# Altium PCB UZ_Per_ADC_to_BNC.PcbDoc
Units mm, origin at the board's own origin, x right, y up, seen from the top; angles counter-clockwise.
Board outline 53 x 90 mm, 2 copper layers (Top Layer, Bottom Layer), stack 1.571 mm thick; 22 components, 11 nets, 60 pads, 3 vias.
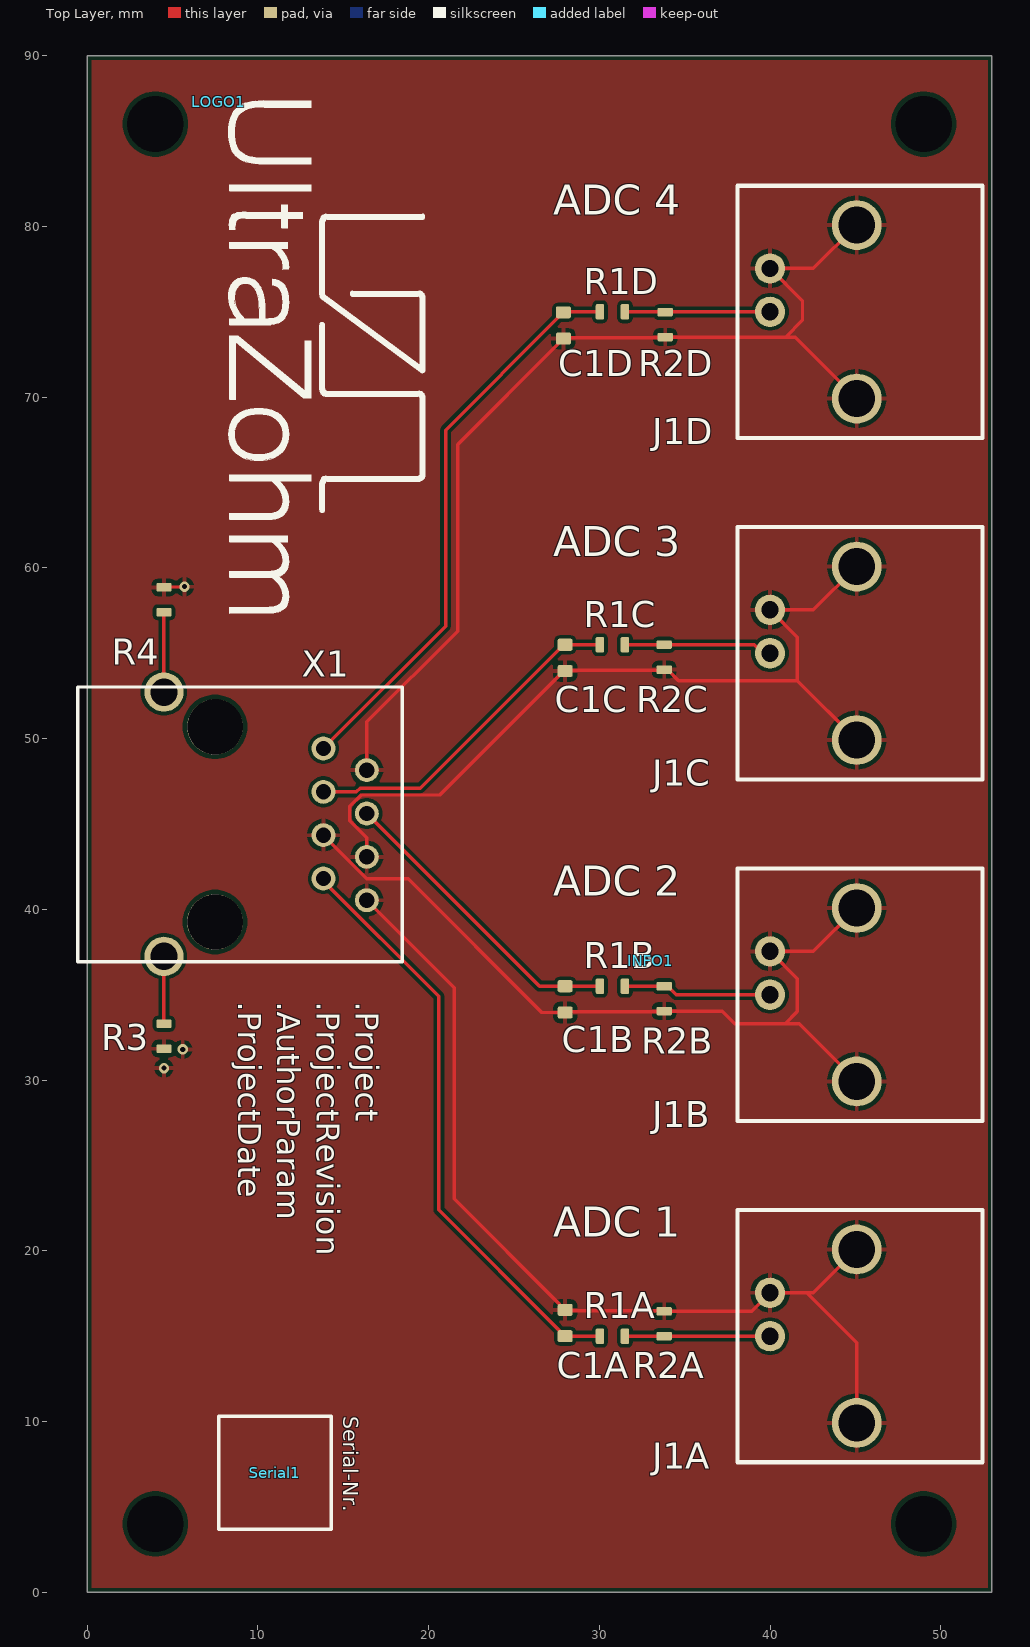
[diagram p0: Top Layer view]
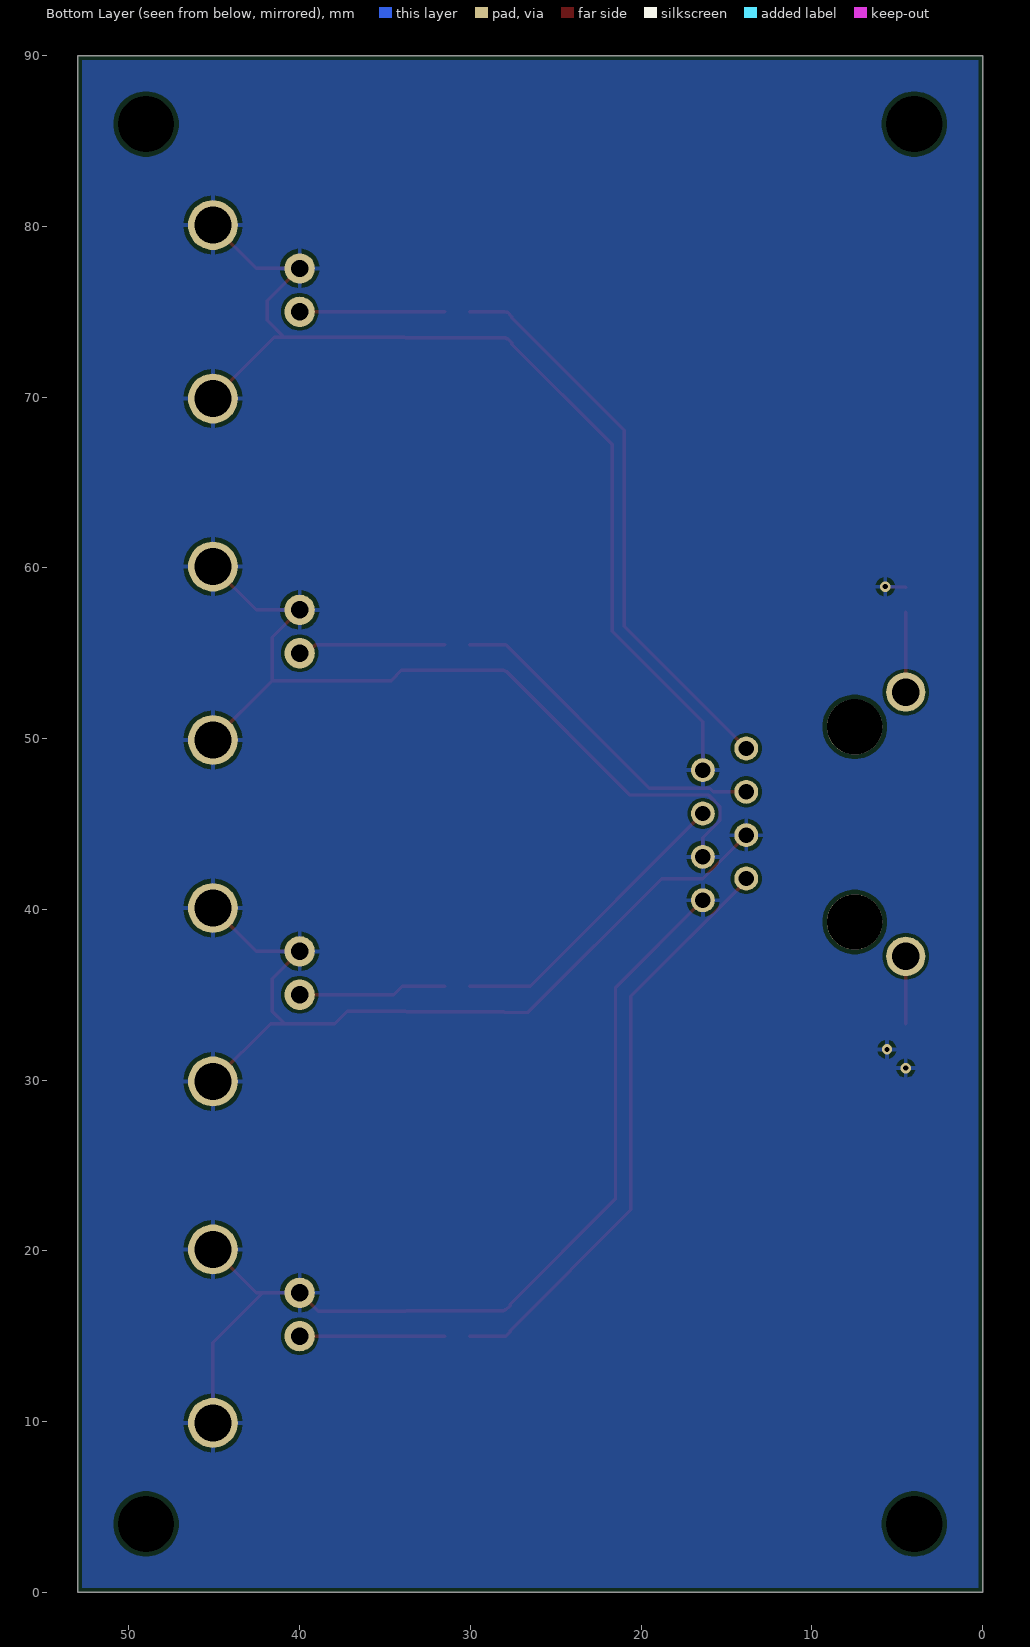
[diagram p1: Bottom Layer view, seen from below]
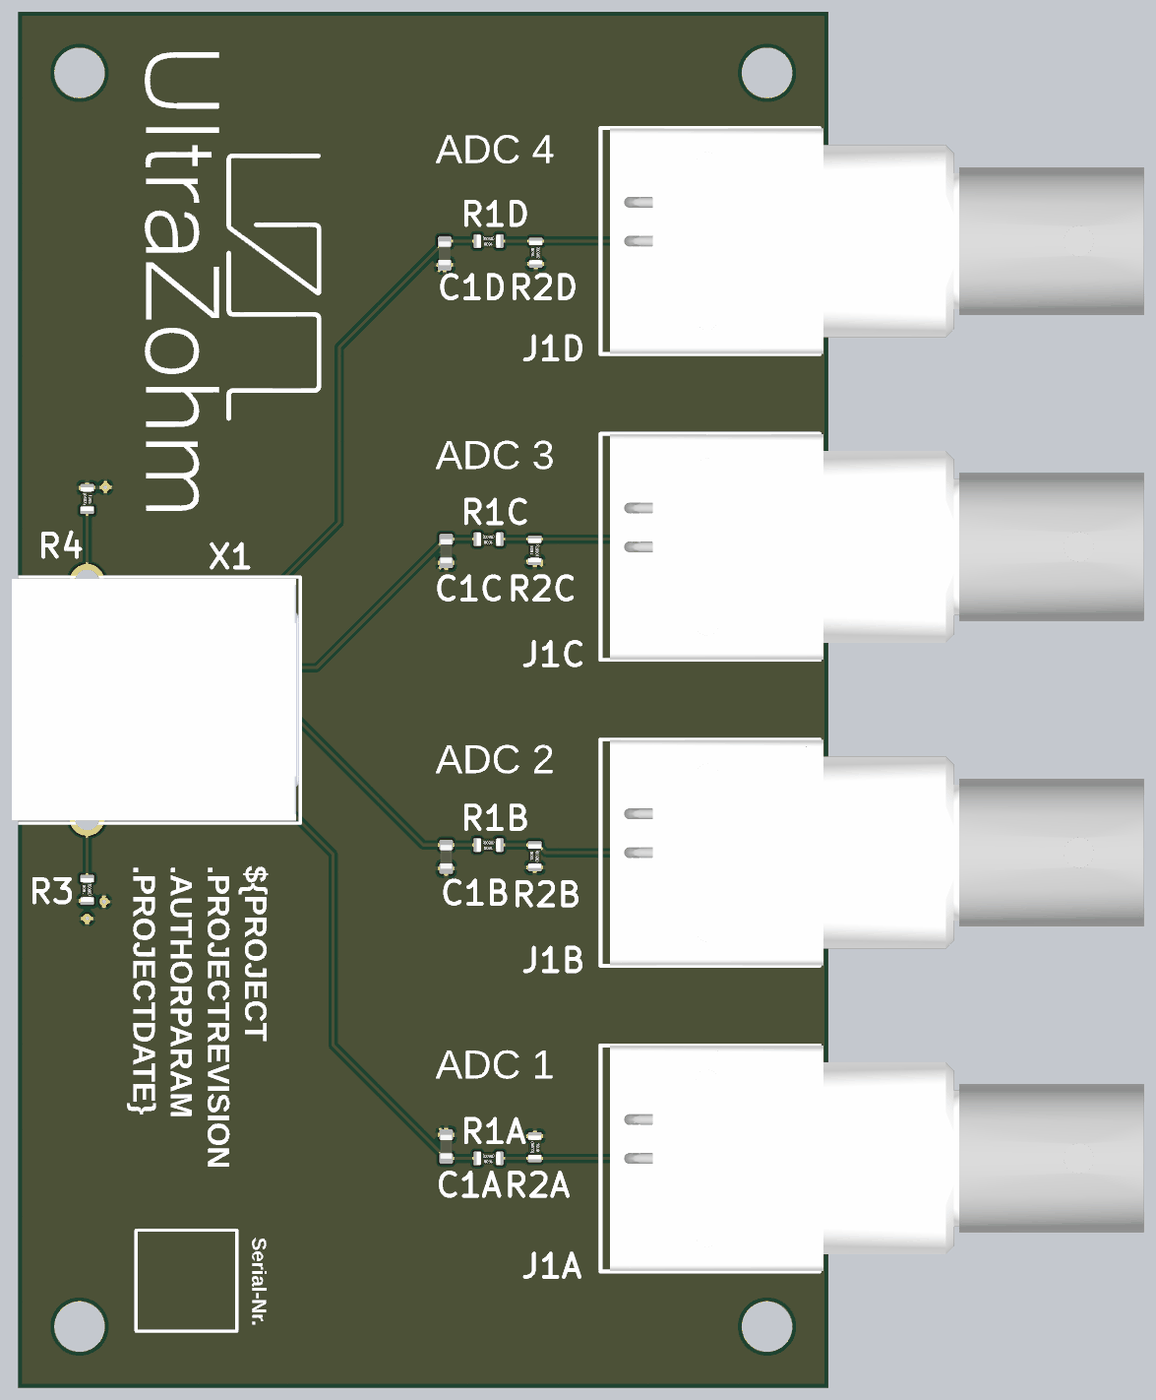
[diagram p2: 3D render of the assembled board from above, using the file's embedded part models]

## Layer stack, top to bottom
Top Solder: solder mask 0.0102, Solder Resist, Dk 3.5
Top Layer: signal copper 0.0356
Dielectric 1: dielectric 1.5, FR-4, Dk 4.8
Bottom Layer: signal copper 0.0356
Bottom Solder: solder mask 0.0102, Solder Resist, Dk 3.5

## Board outline
0,0 53,0 53,90 0,90

## Design rules (kind name [scope] priority, off if disabled: settings)
BoardOutlineClearance [All] p1: gap=0.254 ignorepadtopadclearanceinfootprint=FALSE except(0: Arc-SplitContinuation Track-SplitContinuation SMDPad-SplitContinuation THPad-SplitContinuation Via-SplitContinuation Fill-SplitContinuation Poly-SplitContinuation Region-SplitContinuation Text-SplitContinuation)
Clearance [All] p1: gap=0.2 ignorepadtopadclearanceinfootprint=FALSE except(0.127: Arc-Arc Arc-Track Track-Track; 0.254: Arc-Via Arc-Text Arc-Hole Track-Via Track-Text Track-Hole SMDPad-Via SMDPad-Text SMDPad-Hole THPad-Via THPad-Text THPad-Hole Via-Via Via-Text Via-Hole Fill-Text Fill-Hole Poly-Text Poly-Hole Region-Text Region-Hole Text-Text Text-Hole)
HoleSize [All] p1: absolutevalues=TRUE maxlimit=6.3 minlimit=0.3 maxpercent=80.000 minpercent=20.000
PolygonConnect [All] p1: connectstyle=Relief reliefconductorwidth=0.254 reliefentries=4 polygonreliefangle="90 Angle" airgapwidth=0.254
RoomDefinition BNC3 [InComponentClass('BNC3')] p1: confinementstyle=ConfineIn formatcopy=TRUE lockcomponents=FALSE outline 27,46.667 73.7,46.667 73.7,63.767 27,63.767
RoomDefinition BNC2 [InComponentClass('BNC2')] p2: confinementstyle=ConfineIn formatcopy=TRUE lockcomponents=FALSE outline 27,26.667 73.7,26.667 73.7,43.767 27,43.767
RoomDefinition BNC4 [InComponentClass('BNC4')] p3: confinementstyle=ConfineIn formatcopy=TRUE lockcomponents=FALSE outline 27,66.5 73.7,66.5 73.7,83.6 27,83.6
RoomDefinition BNC1 [InComponentClass('BNC1')] p4: confinementstyle=ConfineIn formatcopy=TRUE lockcomponents=FALSE outline 27,6.5 73.7,6.5 73.7,23.6 27,23.6
RoutingVias [All] p1: holewidth=0.2 width=0.4 viastyle="Through Hole" minholewidth=0.2 minwidth=0.4 maxholewidth=3.4 maxwidth=3.4
SolderMaskExpansion [All] p1: expansion=0.102 istentingtop=FALSE
SupplyNets "Schematic Supply Nets" [InNet('GND')] p1: voltage=0.000
Width [All] p1: maxlimit=0.5 minlimit=0.2 preferedwidth=0.254
29 further rules are at their usual default settings.

## Classes and differential pairs
net class "AIN A P[1..4]": "AIN A P1" "AIN A P2" "AIN A P3" "AIN A P4"
channel class rj45_bnc: BNC1 BNC2 BNC3 BNC4
component class Top_sheet: INFO1 LOGO1 R3 R4 Serial1 X1
component class BNC4: C1D J1D R1D R2D
component class BNC3: C1C J1C R1C R2C
component class BNC2: C1B J1B R1B R2B
component class BNC1: C1A J1A R1A R2A

## Components (designator, comment, footprint, x,y, rotation, side; value= is the part's Value field where it differs from the comment)
C1A "10 nF" C_0603_TE 28,15.77 r180 top (schematic designator C1)
C1B "10 nF" C_0603_TE 28,34.73 r0 top (schematic designator C1)
C1C "10 nF" C_0603_TE 28,54.73 r0 top (schematic designator C1)
C1D "10 nF" C_0603_TE 27.9,74.2 r0 top (schematic designator C1)
INFO1 "Design Information" Design_info 33,37 r270 top
J1A "5227661-1" "Right Angle BNC" 40,15 r270 top (schematic designator J1)
J1B "5227661-1" "Right Angle BNC" 40,35 r270 top (schematic designator J1)
J1C "5227661-1" "Right Angle BNC" 40,55 r270 top (schematic designator J1)
J1D "5227661-1" "Right Angle BNC" 40,75 r270 top (schematic designator J1)
LOGO1 "UZ Logo" UZ_Logo_small 7.7,87.3 r270 top value=Logo
R1A "0R" R_0603_TE 30.77,15 r270 top (schematic designator R1)
R1B "0R" R_0603_TE 30.77,35.5 r270 top (schematic designator R1)
R1C "0R" R_0603_TE 30.77,55.5 r270 top (schematic designator R1)
R1D "0R" R_0603_TE 30.77,75 r270 top (schematic designator R1)
R2A "10k" R_0603_TE 33.8,15.73 r0 top (schematic designator R2)
R2B "10k" R_0603_TE 33.8,34.77 r180 top (schematic designator R2)
R2C "10k" R_0603_TE 33.8,54.77 r180 top (schematic designator R2)
R2D "10k" R_0603_TE 33.86,74.249 r180 top (schematic designator R2)
R3 "0R" R_0603_TE 4.5,32.57 r180 top
R4 "0R" R_0603_TE 4.5,58.13 r0 top
Serial1 "Serialnumber 6.3 x 6.3 mm" SERIAL_6.3X6.3MM 11,7 r270 top value=REV
X1 "R-RJ45R10P-B000" R-RJ45R10P-B000 10,45 r270 top

## Footprints (in the part's own frame and the unit in brackets; to place one, negate y for a bottom-side part, rotate by r counter-clockwise, add the part's x,y. Pads: shape width x height; smd on the part's side, far side on the other; paste and mask are expansions set on the pad)
C_0603_TE [mm] "Vishay VJ0603 1.6 x 0.8 (+0.15/-0.1) 0.4 +/- 0,15mm Kontakte"
  rrect33% 0.88x0.71 smd: 1(0,0.77) 2(0,-0.77)
  body extent -0.4,-0.8 0.4,0.8, height 1
Design_info [mm] "Design information about the PCB"
R-RJ45R10P-B000 [mm]
  round 1.4 hole 0.9: A1(-4.425,3.842) A2(-3.155,6.382) A3(-1.885,3.842) A4(-0.615,6.382) A5(0.655,3.842) A6(1.925,6.382) A7(3.195,3.842) A8(4.465,6.382)
  round 3.25 hole 3.25 unplated: MH3(-5.69,-2.508) MH4(5.74,-2.508)
  round 2.3 hole 1.6: S1(-7.725,-5.5) S2(7.75,-5.5)
  silkscreen extent -8.03,-10.55 8.08,8.45, body extent -7.9,-10.43 7.9,8.37, height 14.5
R_0603_TE [mm] "Vishay D0603 1.55 x 0.85 (+0.1/-0.05) 0.3 +/- 0,2mm Kontakte"
  rrect33% 0.9x0.5 smd: 1(0,0.73) 2(0,-0.73)
  body extent -0.42,-0.78 0.43,0.77, height 0.45
"Right Angle BNC" [mil]
  round 70 hole 40: 1(0,0) 2(-100,0)
  round 115 hole 85: 3(200,200) 4(-200,200)
  silkscreen extent -291,-75 291,490, body extent -290,-50 291,1325, height 519
SERIAL_6.3X6.3MM [mm]
  silkscreen extent -3.3,-3.3 3.3,3.3
UZ_Logo_small [mm] "logo width 3cm"
  silkscreen extent -0.05,0.57 29.94,12.12

## Part data
C1A C1B C1C C1D: library part UZgen_C_0603_10nF_50V_NP0, "Generic capacitor", Device Package=0603, Manufacturer=UZgen, Tolerance="10 %", Voltage=50V, Created from=UZgenTool, Created On="13.12.2024 11:08:49", Last Updated="13.12.2024 11:08:49", Manufacturer Part Number=UZgen_C_0603_10nF_50V_NP0, Mounting Type=SMD, PartID=5806, Technology=NP0
INFO1: Manufacturer=UltraZohm, Supplier Part Number 1=-, Component Type="Design Information", ComponentLink1Description=https://docs.ultrazohm.com/, ComponentLink1URL=homepage, Created from=MGremer, Created On="03.11.2021 09:04:23", Last Updated="03.11.2021 09:28:34", Live Cycle Status=1, Manufacturer Part Number="Design Information", PartID=12, Supplier 1=-, Type="Design Information"
J1A J1B J1C J1D: "RF Connectors / Coaxial Connectors 50 Ohm BNC Jack and Plug / right-angle", Alternate Manufacturer=-, LCSC Part Number=C2979611, Manufacturer="TE Connectivity", Operating Temperature="-65 °C to +125 °C", PartNumber="Used in BOM report", Supplier Part Number 1=571-5227661-1, Alternate PartNumber=-, ComponentLink1Description=Datasheet, ComponentLink1URL=https://www.te.com/commerce/DocumentDelivery/DDEController?Action=srchrtrv&DocNm=1307191_BNC_Connectors&DocType=Catalog%20Section&DocLang=English&PartCntxt=5227661-1&DocFormat=pdf, CompType="Used in some BOM reports.  Useful for finding later.", Created from=EAufderheide, Created On="16.01.2026 12:04:20", Last Updated="16.01.2026 12:45:05", Manufacturer Part Number=5227661-1, Mounting Type=THT, MountType="SMT, TH, or N/A", PackageReference="eg:  0603, used in PnP report", PartID=71, RoHS="Used in BOM report.  Use Y or N.", Series=BNC, Supplier 1=Mouser, Supplier 2=LCSC, Supplier 3=LCSC, Supplier Part Number 2=C2979611, Supplier Part Number 3=C305920, SymbolCreator="Use LDAP id", SymbolVersion="use current date i.e. 2008-05-20", U/M="EA, IN, or GM"
LOGO1: library part "Logo small", Manufacturer=UltraZohm, Supplier Part Number 1=-, Component Type=Logo, ComponentLink1Description=https://docs.ultrazohm.com/, ComponentLink1URL=homepage, Created=Jan2021_Liegmann, Created from=MGremer, Created On="03.11.2021 09:04:23", Last Updated="03.11.2021 09:05:50", Live Cycle Status=1, Manufacturer Part Number="Logo small", PartID=10, Supplier 1=-, Type=Logo
R1A R1B R1C R1D R3 R4: library part UZgen_R_0603_0R, "Generic resistor", Device Package=0603, Manufacturer=UZgen, Tolerance="1 %", Created from=UZgenTool, Created On="08.07.2024 14:34:30", Last Updated="08.07.2024 14:34:30", Manufacturer Part Number=UZgen_R_0603_0R, Mounting Type=SMD, PartID=581
R2A R2B R2C R2D: library part UZgen_R_0603_10k, "Generic resistor", Device Package=0603, Manufacturer=UZgen, Tolerance="1 %", Created from=AGeiger, Created On="02.07.2024 14:34:53", Last Updated="02.07.2024 14:37:16", Manufacturer Part Number=UZgen_R_0603_10k, Mounting Type=SMD, PartID=1
Serial1: library part "Serial Number", "Serial Number", Manufacturer=UltraZohm, Supplier Part Number 1=-, Component Type="Serial Number", ComponentLink1Description=https://docs.ultrazohm.com/, ComponentLink1URL=homepage, Created=2018_09_18_AGeiger, Created from=MGremer, Created On="03.11.2021 09:04:23", Last Updated="03.11.2021 09:28:34", Live Cycle Status=1, Manufacturer Part Number="Serial Number", PartID=11, Supplier 1=-, Type="Serial Number"
X1: "RJ45Receptacle 1 Shielded Bend insert Without LED 0℃~+70℃ Plugin Ethernet Connectors / Modular Connectors (RJ45 RJ11) ROHS", LCSC Part Number=C386758, Manufacturer="Ckmtw(Shenzhen Cankemeng)", Operating Temperature="0 °C to +70 °C", ComponentLink1Description=Datasheet, ComponentLink1URL=https://jlcpcb.com/api/file/downloadByFileSystemAccessId/8588892085580021760, Created from=KIlhan, Created On="20.03.2025 09:19:07", Last Updated="18.05.2025 18:44:47", Manufacturer Part Number=R-RJ45R10P-B000, Mounting Type=THT, PartID=57, Series=RJ45, Supplier 1=LCSC, Supplier Part Number 1=C386758

## Free pads (board coordinates)
  round 1.524 hole 3.3: 2(4,4) 2(4,86) 2(49,4) 2(49,86)

## Via types
v1: diameter 0.6, hole 0.3, Top Layer to Bottom Layer, 3 vias

## Nets (pads, with @x,y where several pads share a name; then routed paths per layer and width w, separated by ;. In a path a pad name is that pad's centre, name@x,y a point inside that pad or via, vN(x,y) a via of type N, cw(c..) or ccw(c..) an arc to the next point about the centre after c; other vN are vias at no path point)
"AIN A P1": C1A.1 R1A.2 X1.A7 | length 34.8
  Top Layer w0.2: X1.A7 13.842,41.661 20.6,34.903 20.6,22.4 27.671,15.329 27.671,15.254 27.924,15 C1A.1 R1A.2
"AIN A P2": C1B.1 R1B.2 X1.A4 | length 17.8
  Top Layer w0.2: X1.A4 26.497,35.5 C1B.1 R1B.2
"AIN A P3": C1C.1 R1C.2 X1.A3 | length 19.8
  Top Layer w0.2: X1.A3 15.776,46.885 15.991,47.1 19.515,47.1 27.915,55.5 C1C.1 R1C.2
"AIN A P4": C1D.1 R1D.2 X1.A1 | length 33.5
  Top Layer w0.2: X1.A1 21,56.583 21,68.07 27.571,74.641 27.571,74.716 27.824,74.97 C1D.1 ; C1D.1@28,75 R1D.2
BNC_SigA: J1A.1 R1A.1 R2A.2 | length 8.5
  Top Layer w0.2: R1A.1 J1A.1
BNC_SigB: J1B.1 R1B.1 R2B.2 | length 8.7
  Top Layer w0.2: R1B.1 R2B.2 34,35.5 34.5,35 J1B.1
BNC_SigC: J1C.1 R1C.1 R2C.2 | length 8.7
  Top Layer w0.2: R1C.1 R2C.2 39.073,55.5 39.573,55 J1C.1
BNC_SigD: J1D.1 R1D.1 R2D.2 | length 8.5
  Top Layer w0.2: R1D.1 J1D.1
GND: C1A.2 C1B.2 C1C.2 C1D.2 J1A.2 J1A.3 J1A.4 J1B.2 J1B.3 J1B.4 J1C.2 J1C.3 J1C.4 J1D.2 J1D.3 J1D.4 R2A.1 R2B.1 R2C.1 R2D.1 R3.1 R4.1 X1.A2 X1.A5 X1.A6 X1.A8 | length 215.3
  Top Layer w0.2: R4.1 4.52,58.88 5.68,58.88 v1(5.7,58.9) ; X1.A5 16.387,41.8 18.8,41.8 26.64,33.96 C1B.2 28.04,34 33.76,34 R2B.1 37.205,34.04 37.945,33.3 40.883,33.3 ; X1.A8 21.5,35.417 21.5,23.04 27.671,16.869 27.671,16.794 27.924,16.54 C1A.2 28.04,16.5 33.76,16.5 R2A.1 38.92,16.46 J1A.2 42.16,17.54 ; X1.A6 16.382,44.201 15.382,45.201 15.382,46.029 16.053,46.7 20.655,46.7 27.915,53.96 C1C.2 28.04,54 34.04,54 34.64,53.4 41.6,53.4 ; X1.A2 16.382,50.983 21.7,56.3 21.7,67.23 27.571,73.101 27.571,73.176 27.824,73.43 C1D.2 27.944,73.474 33.816,73.474 R2D.1 40.919,73.519 ; J1A.3 45.08,14.62 42.16,17.54 ; J1A.4 42.54,17.54 42.16,17.54 ; J1B.3 41.7,33.3 40.883,33.3 ; J1B.4 42.54,37.54 J1B.2 41.6,35.94 41.6,34.017 40.883,33.3 ; J1C.3 41.6,53.4 ; J1C.4 42.54,57.54 J1C.2 41.6,55.94 41.6,53.4 ; J1D.3 41.481,73.519 40.919,73.519 ; J1D.4 42.54,77.54 J1D.2 41.9,75.64 41.9,74.5 40.919,73.519
  other v1: 4.5,30.7 5.6,31.8
NetR3_2: R3.2 X1.S2 | length 4
  Top Layer w0.2: R3.2 X1.S2
NetR4_2: R4.2 X1.S1 | length 4.7
  Top Layer w0.2: X1.S1 R4.2
pads on no net: X1.MH3 X1.MH4

## Polygon pours and split planes (outlines as drawn)
GND on Bottom Layer "GND_TOP" (solid, pour order 5): 0,90 0,0 53,0 53,90
GND on Top Layer "GND_TOP" (solid, pour order 4): 0,90 0,0 53,0 53,90

## Silkscreen, mask and mechanical layers (free items; w line width, h text height)
Top Overlay:
  text "ADC 4" at 27.3,80.1 h3
  text "ADC 3" at 27.3,60.1 h3
  text "ADC 2" at 27.3,40.2 h3
  text "ADC 1" at 27.3,20.231 h3
Board:
  the board outline again, w0.1

## Text inside footprints (layer, text, board x,y; h text height)
Serial1: Top Overlay "Serial-Nr." at 14.7,10.3 h1.5 r270; Top Assembly "SerialNr" at 12.7,9.5 h0.7 r270